# Altium PCB PCB1_IGNIS_v2.PcbDoc
Units mil, origin at the board's own origin, x right, y up, seen from the top; angles counter-clockwise.
Board outline 3740.16 x 1574.8 mil, 4 copper layers (Top Layer, GND, PWR, Bottom Layer), stack 23.756 mil thick; 91 components, 58 nets, 359 pads, 9 vias.
Unrouted connection lines stored in the file: 222.
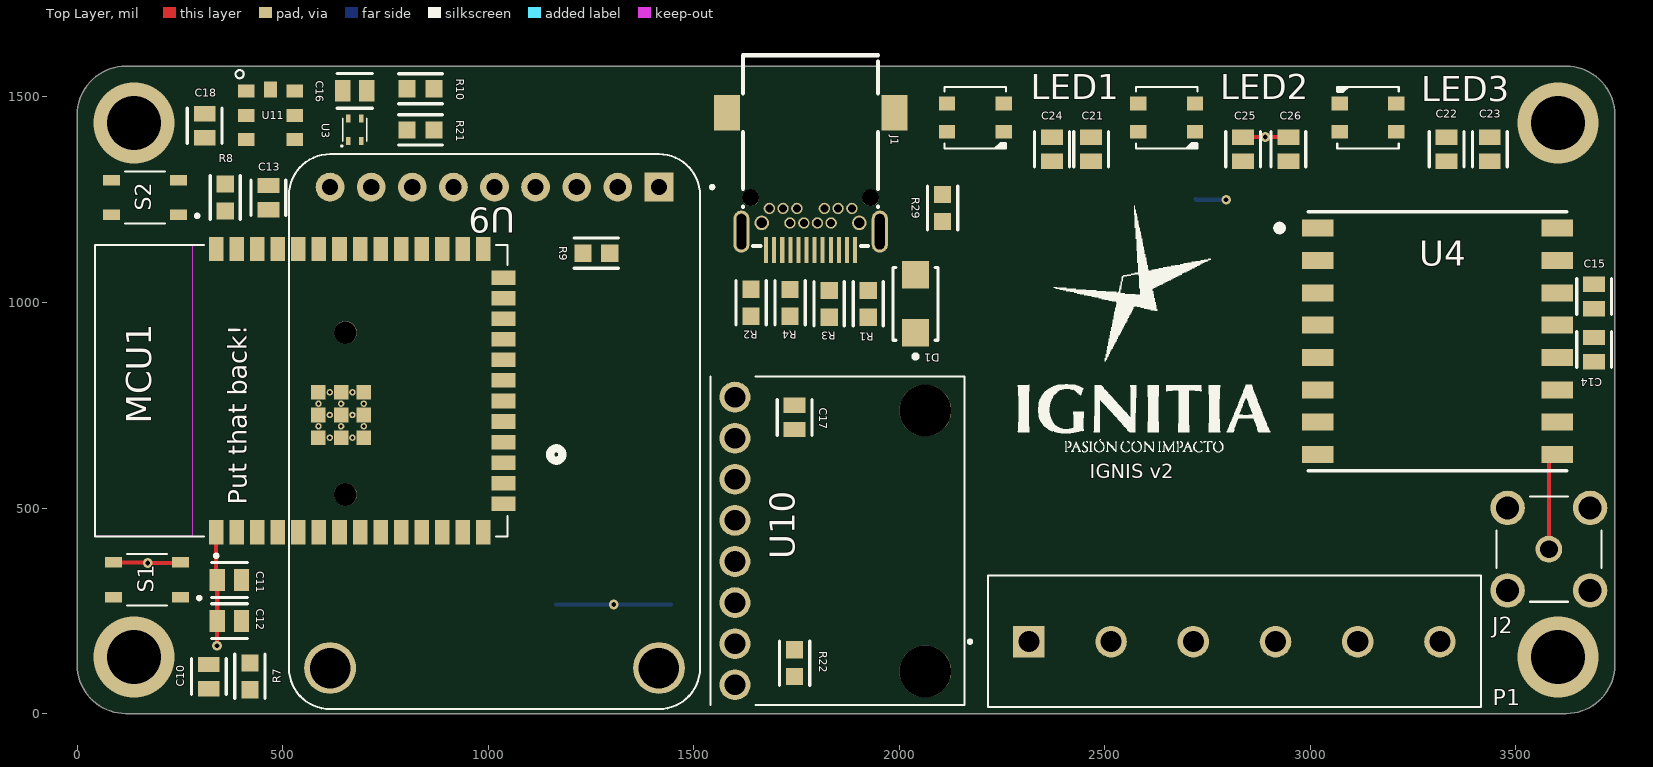
[diagram p0: Top Layer view]
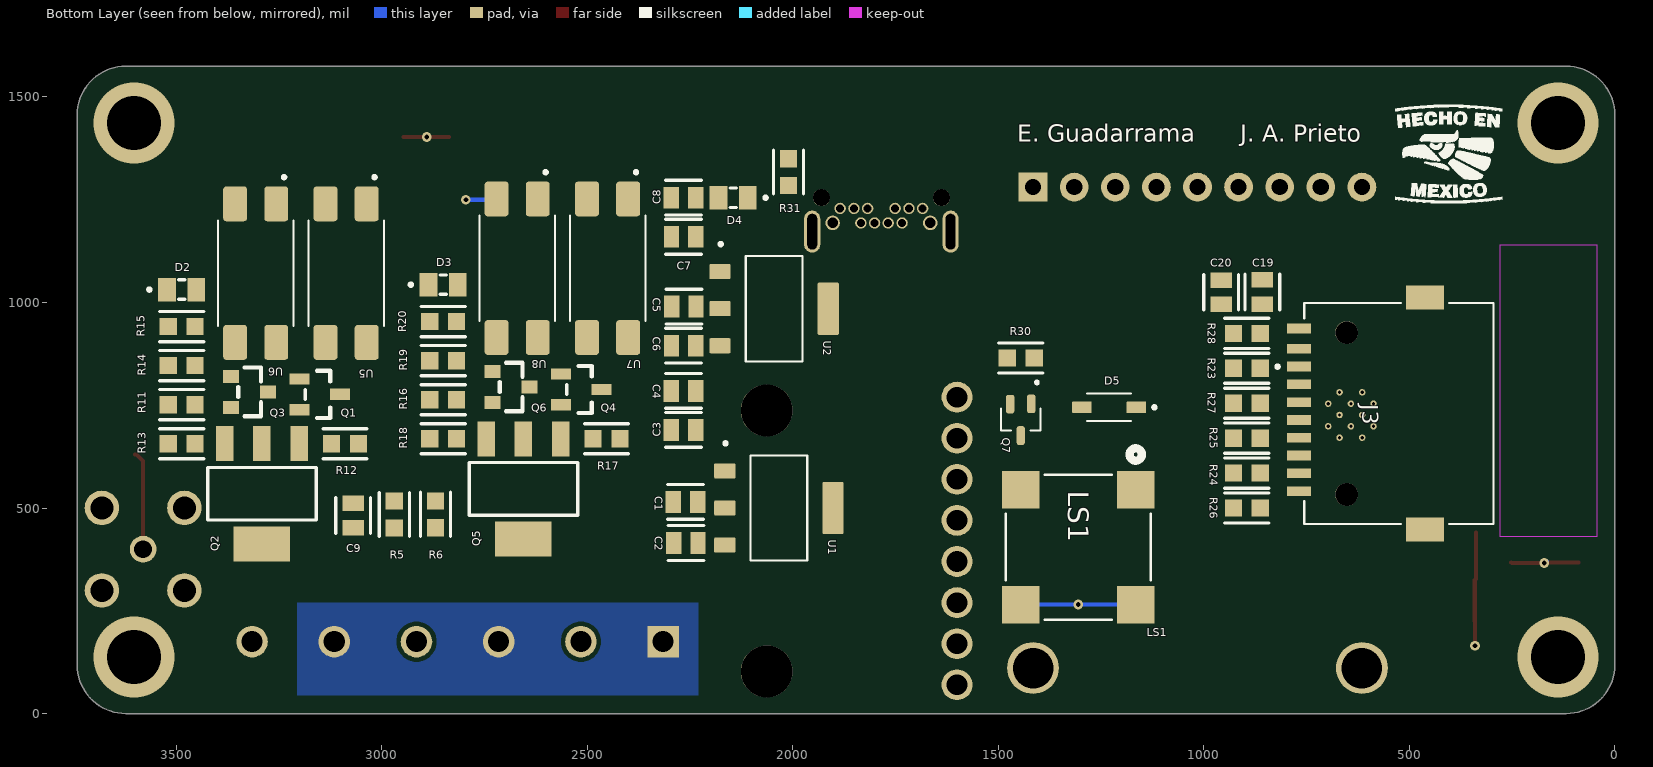
[diagram p1: Bottom Layer view, seen from below]
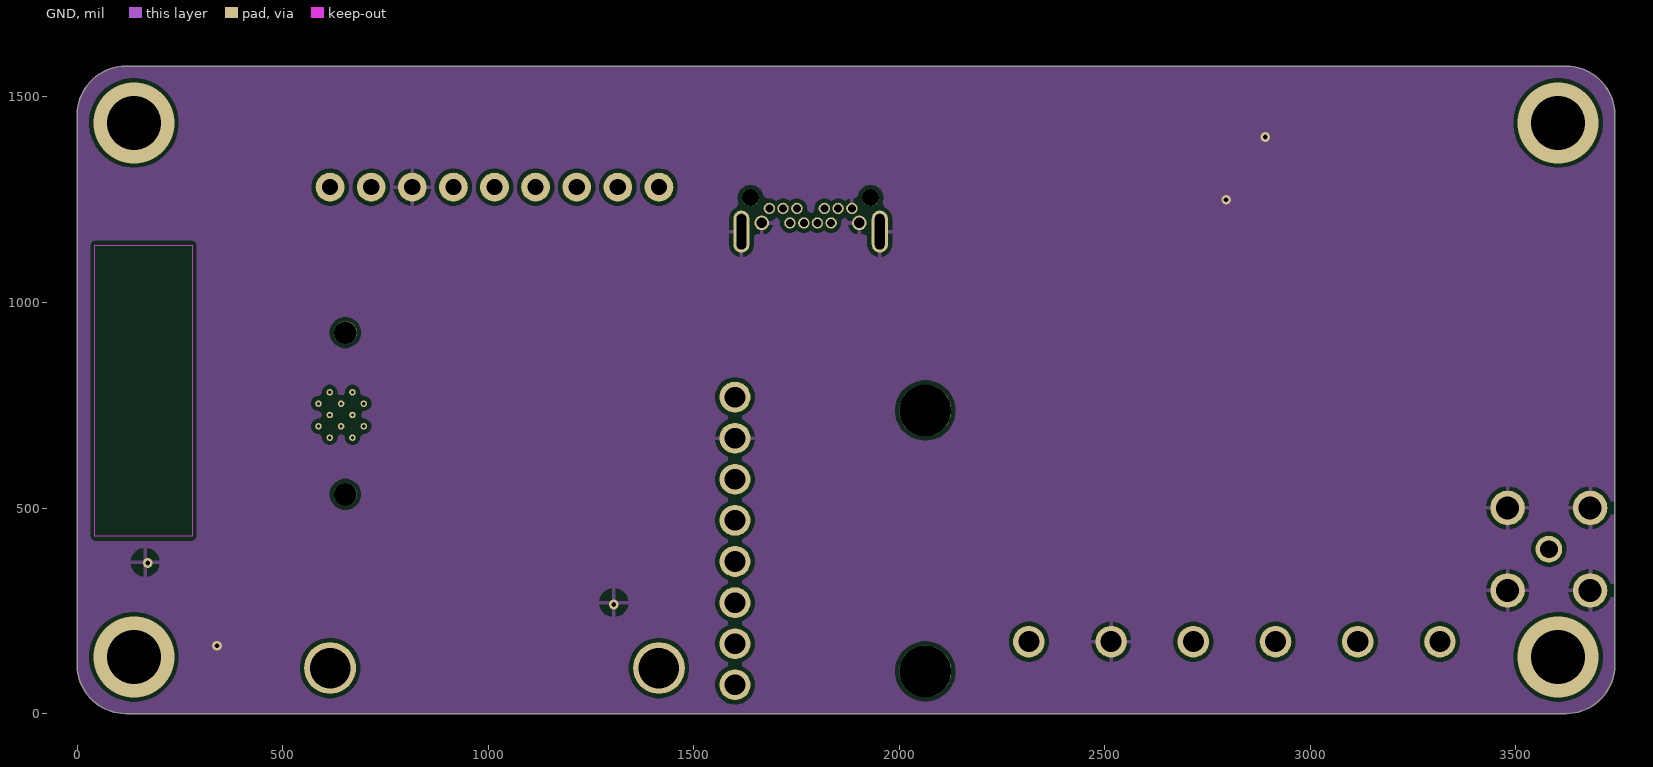
[diagram p2: GND]
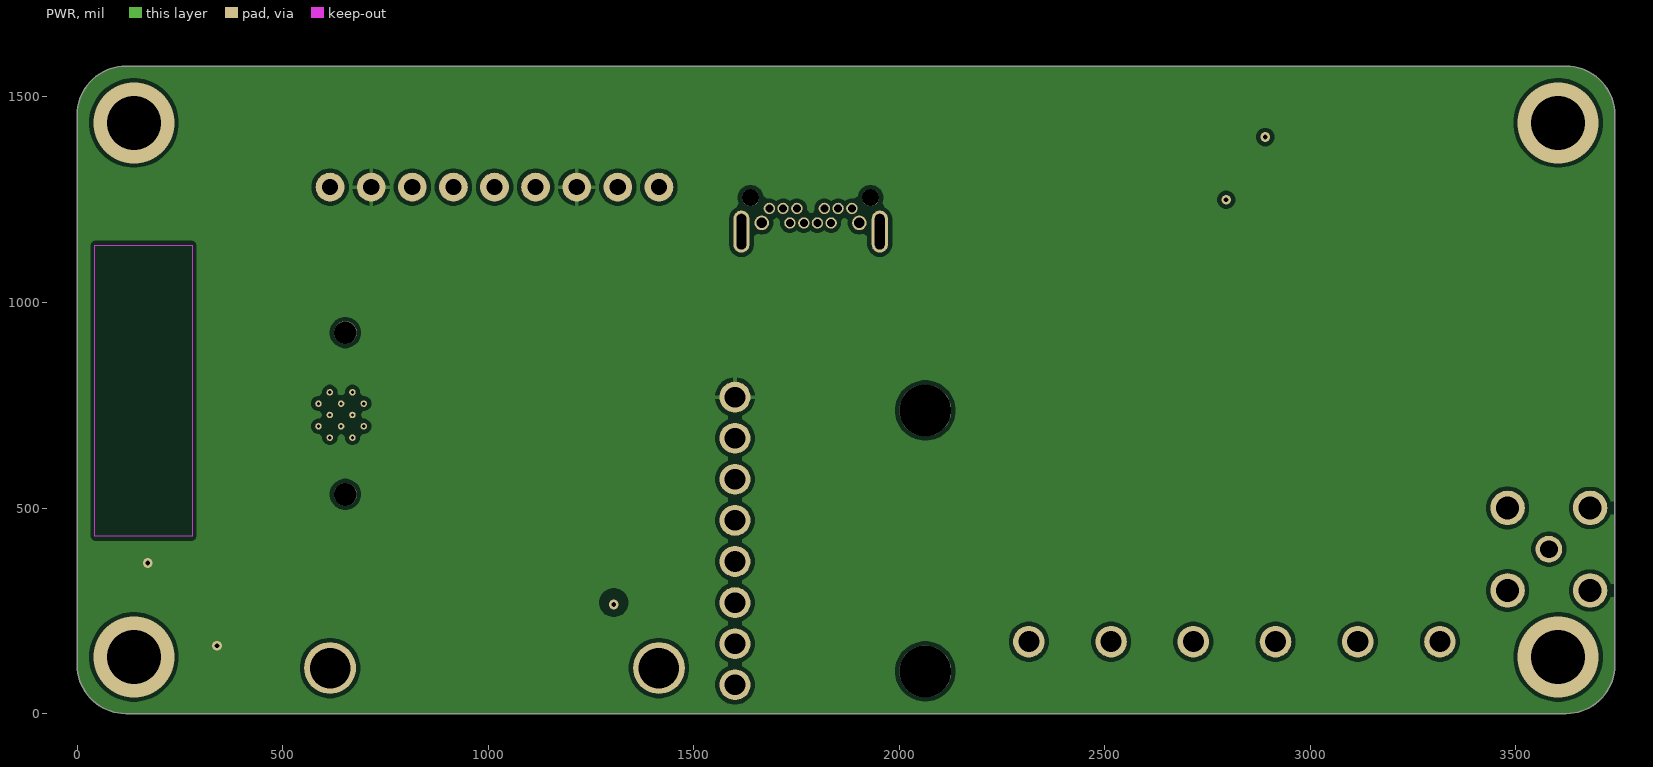
[diagram p3: PWR]

## Layer stack, top to bottom
Top Solder: solder mask 0.4, Solder Resist, Dk 3.5
Top Layer: signal copper 1.378
Dielectric 2: prepreg 2.8, PP-006, Dk 4.1
GND: signal copper 1.4
Dielectric 1: dielectric 12.6, FR-4, Dk 4.8
PWR: signal copper 1.4
Dielectric 3: prepreg 2.8, PP-006, Dk 4.1
Bottom Layer: signal copper 1.378
Bottom Solder: solder mask 0.4, Solder Resist, Dk 3.5

## Board outline
0,118 0,1456.8 cw(c118,1456.8) 118,1574.8 3622.16,1574.8 cw(c3622.16,1456.8) 3740.16,1456.8 3740.16,118 cw(c3622.16,118) 3622.16,0 118,0 cw(c118,118)

## Design rules (kind name [scope] priority, off if disabled: settings)
Clearance USBC_3 [InComponent('J1') vs InComponent('J1')] p1: gap=3.94 ignorepadtopadclearanceinfootprint=FALSE
Clearance MCU_2 [InComponent('MCU1') vs InComponent('MCU1')] p2: gap=1.97 ignorepadtopadclearanceinfootprint=FALSE
Clearance [All] p3: gap=10 ignorepadtopadclearanceinfootprint=FALSE
ComponentClearance GPS [InComponent('U9') vs InComponent('MCU1') Or InComponent('R9')] p1: gap=0 collisioncheckmode=3 verticalgap=100000 showdistances=FALSE donotcheckwithout3dbody=TRUE
ComponentClearance IMU [InComponent('U10') vs InComponent('U9')] p2: gap=0 collisioncheckmode=3 verticalgap=100000 showdistances=FALSE donotcheckwithout3dbody=TRUE
ComponentClearance Buzzer [InComponent('LS1') vs InComponent('R30') Or InComponent('R31') Or InComponent('Q7')  Or InComponent('P1')] p3: gap=0 collisioncheckmode=3 verticalgap=100000 showdistances=FALSE donotcheckwithout3dbody=TRUE
ComponentClearance SD [InComponent('J3') Or InComponent('C19') Or InComponent('C20') Or InComponent('R23') Or InComponent('R24') Or InComponent('R25') Or InComponent('R26') Or InComponent('R27') Or InComponent('R28') vs InComponent('U9') Or InComponent('MCU1')] p4: gap=0 collisioncheckmode=3 verticalgap=100000 showdistances=FALSE donotcheckwithout3dbody=TRUE
ComponentClearance [All] p5: gap=10 collisioncheckmode=3 verticalgap=10 showdistances=FALSE
DiffPairsRouting [All] p1: maxlimit=10 minlimit=10 mostfreqgap=10 toplayer_minwidth=15 toplayer_maxwidth=15 toplayer_prefwidth=15 midlayer1_minwidth=15 midlayer1_maxwidth=15 midlayer1_prefwidth=15 midlayer2_minwidth=15 midlayer2_maxwidth=15 midlayer2_prefwidth=15 bottomlayer_minwidth=15 bottomlayer_maxwidth=15 bottomlayer_prefwidth=15 maxuncoupledlength=500
HoleSize IMU_Hole [All] p1: absolutevalues=TRUE maxlimit=157.48 minlimit=1 maxpercent=80.000 minpercent=20.000
HoleSize "Mounting Holes" [IsVia] p2: absolutevalues=TRUE maxlimit=137.8 minlimit=1 maxpercent=80.000 minpercent=20.000
HoleSize [All] p3: absolutevalues=TRUE maxlimit=100 minlimit=1 maxpercent=80.000 minpercent=20.000
MinimumSolderMaskSliver USBC_1 [InComponent('J1') vs InComponent('J1')] p1: minsoldermaskwidth=1.18
MinimumSolderMaskSliver [All] p2: minsoldermaskwidth=10
PolygonConnect PolygonConnect_1 [All vs IsNamedPolygon('VBAT_L04_P000')] p1: connectstyle=Direct reliefconductorwidth=10 reliefentries=4 polygonreliefangle="90 Angle" airgapwidth=10
PolygonConnect [All] p2: connectstyle=Relief reliefconductorwidth=10 reliefentries=4 polygonreliefangle="90 Angle" airgapwidth=10
RoutingVias [All] p1: holewidth=12 width=24 viastyle="Through Hole" minholewidth=10 minwidth=20 maxholewidth=28 maxwidth=50
SilkToSolderMaskClearance MCU_GPS [InComponent('MCU1') vs InComponent('U9')] p1: minsilkscreentomaskgap=1.97 clearancetoexposedcopper=TRUE
SilkToSolderMaskClearance Diodes [InComponent('D1') Or InComponent('D2') Or InComponent('D3') Or InComponent('D4') Or InComponent('D5')] p2: minsilkscreentomaskgap=1.97 clearancetoexposedcopper=TRUE
SilkToSolderMaskClearance USBC_2 [InComponent('J1') vs InComponent('J1')] p3: minsilkscreentomaskgap=1.18 clearancetoexposedcopper=TRUE
SilkToSolderMaskClearance [IsPad] p4: minsilkscreentomaskgap=3.94 clearancetoexposedcopper=TRUE
SolderMaskExpansion [All] p1: expansion=0 istentingtop=FALSE
SupplyNets "Schematic Supply Nets_3" [InNet('VCC_3V3')] p1: voltage=0.000
SupplyNets "Schematic Supply Nets_2" [InNet('GND')] p2: voltage=0.000
SupplyNets "Schematic Supply Nets_1" [InNet('VBAT')] p3: voltage=0.000
SupplyNets "Schematic Supply Nets" [InNet('VCC_5V')] p4: voltage=0.000
Width [All] p1: maxlimit=10 minlimit=10 preferedwidth=10
25 further rules are at their usual default settings.

## Classes and differential pairs
component class U_Storage: C19 C20 J3 R23 R24 R25 R26 R27 R28
component class U_Sensors: C16 C17 C18 R10 R21 R22 U3 U10 U11
component class U_RF_LoRa_&_GPS: C14 C15 J2 R9 U4 U9
component class U_Pyros: D2 D3 P1 Q1 Q2 Q3 Q4 Q5 Q6 R11 R12 R13 R14 R15 R16 R17 R18 R19 R20 U5 U6 U7 U8
component class U_Power: C1 C2 C3 C4 C5 C6 C7 C8 C9 D1 D4 J1 R1 R2 R3 R4 R5 R6 R31 U1 U2
component class U_Indicators: C21 C22 C23 C24 C25 C26 D5 LED1 LED2 LED3 LS1 Q7 R29 R30
component class Main: C10 C11 C12 C13 MCU1 R7 R8 S1 S2
differential pair USB2: +USB2_P -USB2_N

## Components (designator, comment, footprint, x,y, rotation, side; value= is the part's Value field where it differs from the comment)
C1 "10uF" FP-C0805C-DN-MFG 2260.47,515 r0 bottom value="0.10 μF"
C2 "100nF" FP-C0805C-DN-MFG 2259.53,415 r0 bottom value="0.10 μF"
C3 "10uF" FP-C0805C-DN-MFG 2265.47,690 r0 bottom value="0.10 μF"
C4 "100nF" FP-C0805C-DN-MFG 2265.47,785 r0 bottom value="0.10 μF"
C5 "10uF" FP-C0805C-DN-MFG 2264.53,990 r0 bottom value="0.10 μF"
C6 "100nF" FP-C0805C-DN-MFG 2265,895 r0 bottom value="0.10 μF"
C7 "10uF" FP-C0805C-DN-MFG 2265,1160 r0 bottom value="0.10 μF"
C8 "100nF" FP-C0805C-DN-MFG 2265.47,1255 r0 bottom value="0.10 μF"
C9 "100nF" FP-C0805C-DN-MFG 3068.85,482 r270 bottom value="0.10 μF"
C10 "1uF" FP-C0805C-DN-MFG 320,90 r270 top value="0.10 μF"
C11 "100nF" FP-C0805C-DN-MFG 370,325 r180 top value="0.10 μF"
C12 "22uF" FP-C0805C-DN-MFG 370,225 r180 top value="0.10 μF"
C13 "100nF" FP-C0805C-DN-MFG 465,1255 r90 top value="0.10 μF"
C14 "100nF" FP-C0805C-DN-MFG 3690,885.47 r270 top value="0.10 μF"
C15 "10uF" FP-C0805C-DN-MFG 3690,1014.53 r90 top value="0.10 μF"
C16 "100nF" FP-C0805C-DN-MFG 675,1515 r0 top value="0.10 μF"
C17 "100nF" FP-C0805C-DN-MFG 1745,720.47 r270 top value="0.10 μF"
C18 "100nF" FP-C0805C-DN-MFG 310,1430 r270 top value="0.10 μF"
C19 "22uF" FP-C0805C-DN-MFG 857.35,1025.47 r270 bottom value="0.10 μF"
C20 "100nF" FP-C0805C-DN-MFG 957.35,1025 r270 bottom value="0.10 μF"
C21 "100nF" FP-C0805C-DN-MFG 2466.24,1372.97 r90 top value="0.10 μF"
C22 "100nF" FP-C0805C-DN-MFG 3331.24,1372.97 r90 top value="0.10 μF"
C23 "100nF" FP-C0805C-DN-MFG 3436.24,1372.97 r90 top value="0.10 μF"
C24 "10uF" FP-C0805C-DN-MFG 2371.24,1372.97 r90 top value="0.10 μF"
C25 "10uF" FP-C0805C-DN-MFG 2836.24,1372.97 r90 top value="0.10 μF"
C26 "10uF" FP-C0805C-DN-MFG 2946.24,1372.97 r90 top value="0.10 μF"
D1 "SS24SHE3_B/H" FP-95400-MFG 2039.18,996.73 r90 top
D2 "SML-LXT0805IW-TR" LEDC2012X120N 3486.15,1031.5 r180 bottom
D3 "SML-LXT0805IW-TR" LEDC2012X120N 2850,1043.5 r180 bottom
D4 "SML-LXT0805IW-TR" LEDC2012X120N 2144.57,1255 r0 bottom
D5 "1N4148W-7" SOD3715X135N 1230,745 r0 bottom
J1 "2345986-1" TE_2345986-1 1779.18,1411.73 r180 top
J2 "BWSMA-KE-Z001" BAT_WIRELESS_BWSMA-KE-Z001 3580,400 r90 top
J3 "MSD-11-A" CUI_MSD-11-A 525,730 r90 bottom
LED1 "WS2812B" *LED3535 2185,1450 r180 top
LED2 "WS2812B" *LED3535 2650,1450 r180 top
LED3 "WS2812B" *LED3535 3140,1450 r0 top
LS1 "MLT-8530" MLT-8530_JHE 1305,405 r270 bottom
MCU1 "ESP32-S3-WROOM-1-N16R8" XCVR_ESP32-S3-WROOM-1-N16R2 545,785.47 r90 top
P1 "1729160" PHOENIX_1729160 2215,15.55 r0 top
Q1 "S8050_NPN" PCBComponent_1#1 3156.54,773.98 r0 bottom
Q2 "NCE6005AR_Mosfet_N" PCBComponent_1#2 3295,530 r90 bottom
Q3 "SS8550_PNP" PCBComponent_1#3 3311.15,781.5 r0 bottom
Q4 "S8050_NPN" PCBComponent_1#1 2520.39,785.98 r0 bottom
Q5 "NCE6005AR_Mosfet_N" PCBComponent_1#2 2658.85,542 r90 bottom
Q6 "SS8550_PNP" PCBComponent_1#3 2675,793.5 r0 bottom
Q7 "NTS4001NT1G" SOT65P220X100-3N 1445,715 r270 bottom
R1 "5.1k" FP-MCT0603-IPC_A 1924.18,996.73 r270 top
R2 "5.1k" FP-MCT0603-IPC_A 1639.18,999.39 r270 top
R3 "22" FP-MCT0603-IPC_A 1829.18,996.73 r90 top
R4 "22" FP-MCT0603-IPC_A 1734.18,999.08 r90 top
R5 "47k" FP-MCT0603-IPC_A 2968.85,484.35 r270 bottom
R6 "100k" FP-MCT0603-IPC_A 2868.85,484.66 r270 bottom
R7 "10k" FP-MCT0603-IPC_A 420,90.47 r90 top
R8 "10k" FP-MCT0603-IPC_A 360,1255.47 r270 top
R9 "4k7" FP-MCT0603-IPC_A 1262.65,1120 r0 top
R10 "4k7" FP-MCT0603-IPC_A 835,1520 r180 top
R11 "1k" FP-MCT0603-IPC_A 3486.15,751.5 r180 bottom
R12 "100" FP-MCT0603-IPC_A 3088.8,656.5 r0 bottom
R13 "1k" FP-MCT0603-IPC_A 3486.15,656.5 r0 bottom
R14 "1k" FP-MCT0603-IPC_A 3486.15,846.5 r0 bottom
R15 "600" FP-MCT0603-IPC_A 3486.15,941.5 r180 bottom
R16 "1k" FP-MCT0603-IPC_A 2850,763.5 r180 bottom
R17 "100" FP-MCT0603-IPC_A 2452.65,668.5 r0 bottom
R18 "1k" FP-MCT0603-IPC_A 2850,668.5 r0 bottom
R19 "1k" FP-MCT0603-IPC_A 2850,858.5 r0 bottom
R20 "600" FP-MCT0603-IPC_A 2850,953.5 r180 bottom
R21 "4k7" FP-MCT0603-IPC_A 835,1420 r180 top
R22 "4k7" FP-MCT0603-IPC_A 1745,122.65 r90 top
R23 "10k" FP-MCT0603-IPC_A 895,840 r180 bottom
R24 "10k" FP-MCT0603-IPC_A 895,585 r180 bottom
R25 "10k" FP-MCT0603-IPC_A 895,670 r180 bottom
R26 "10k" FP-MCT0603-IPC_A 895,500 r180 bottom
R27 "10k" FP-MCT0603-IPC_A 895,755 r180 bottom
R28 "10k" FP-MCT0603-IPC_A 895,925 r180 bottom
R29 "33" FP-MCT0603-IPC_A 2105,1230 r90 top
R30 "10k" FP-MCT0603-IPC_A 1445,865 r0 bottom
R31 "1k" FP-MCT0603-IPC_A 2010,1317.35 r90 bottom
S1 "Reset" SW_SKRPABE010 170,325.47 r180 top
S2 "Boot" SW_SKRPABE010 165,1255.47 r180 top
U1 "AMS1117-5V" SOT229P700X180-4N 2033.31,500.16 r270 bottom
U2 "AMS1117-3V3" SOT229P700X180-4N 2045,985 r270 bottom
U3 "SHT40-AD1B-R3" SHT4X 675,1420 r90 top
U4 "RFM95W-868S2" XCVR_RFM95W-868S2 3308.66,905.63 r0 top
U5 "PC817X2NIP1B" SOIC254P960X420-4N 3086.15,1071.5 r270 bottom
U6 "PC817X2NIP1B" SOIC254P960X420-4N 3306.15,1071.5 r270 bottom
U7 "PC817X2NIP1B" SOIC254P960X420-4N 2450,1083.5 r270 bottom
U8 "PC817X2NIP1B" SOIC254P960X420-4N 2670,1083.5 r270 bottom
U9 "746" XCVR_746 1015,685.83 r180 top
U10 "GY-521" MODULE_GY-521 1849.21,420 r0 top
U11 "BMP180" LGA7-1.5-3.8X3.6MM 470,1455.47 r90 top

## Footprints (in the part's own frame and the unit in brackets; to place one, negate y for a bottom-side part, rotate by r counter-clockwise, add the part's x,y. Pads: shape width x height; smd on the part's side, far side on the other; paste and mask are expansions set on the pad)
*LED3535 [mm]
  rect 1x0.85 smd: 1(-1.75,0.875) 2(-1.75,-0.875) 3(1.75,-0.875) 4(1.75,0.875)
  silkscreen extent -1.91,-1.9 1.9,1.91, body extent -2.7,-2.5 2.7,2.5, height 1.49
BAT_WIRELESS_BWSMA-KE-Z001 [mm]
  round 1.65 hole 1.1: 1(0,0)
  round 2.13 hole 1.42: 2_1(-2.55,2.55) 2_2(2.55,2.55) 2_3(2.55,-2.55) 2_4(-2.55,-2.55)
  silkscreen extent -3.25,-3.25 3.25,3.25, body extent -3.23,-11.73 3.23,3.23, height 9.75
CUI_MSD-11-A [mm]
  rect 0.6x1.5 smd: CD(5.25,6.18) P1(2.9,6.18) P2(1.8,6.18) P3(0.7,6.18) P4(-0.4,6.18) P5(-1.5,6.18) P6(-2.6,6.18) P7(-3.7,6.18) P8(-4.8,6.18) WP(4,6.18)
  rect 1.5x2.34 smd: G1(-7.17,-1.62) G2(7.17,-1.62)
  round 1.4 hole 1.4 unplated: ""(-5,3.23) ""(5,3.23)
  silkscreen extent -6.84,-5.85 6.84,7.6, body extent -7.39,-5.87 7.39,6.73, height 1.82
FP-95400-MFG [mm]
  rect 1.7x1.68 smd paste+0 mask+0: 1(-1.79,0) 2(1.79,0)
  silkscreen extent -3.37,-1.4 2.25,1.4, body extent -2.74,-1.5 2.74,1.5, height 0.25
FP-C0805C-DN-MFG [mm]
  rect 0.95x1.35 smd paste+0 mask+0: 1(-0.75,0) 2(0.75,0)
  silkscreen extent -1.1,-1.07 1.1,1.07, body extent -1,-0.63 1,0.63, height 0.88
FP-MCT0603-IPC_A [mil]
  rect 41.88x41.82 smd paste+0 mask+0: 1(-32.65,0) 2(32.65,0)
  silkscreen extent -54,-37 54,37, body extent -73,-41 73,41, height 10
LEDC2012X120N [mm]
  rect 1.1x1.45 smd: A(0.9,0) C(-0.9,0)
  silkscreen extent -2.1,-0.6 0.2,0.6, body extent -1,-0.65 1,0.65, height 0.9
LGA7-1.5-3.8X3.6MM [mm]
  rect 0.8x1 smd: 1(1.5,1.5) 2(0,1.5) 3(-1.5,1.5) 4(-1.5,-1.5) 5(0,-1.5) 6(1.5,-1.5)
  rect 1x0.8 smd: 7(1.6,0)
  silkscreen extent 2.29,1.65 2.79,2.16, body extent -1.9,-1.8 1.9,1.8, height 1
MLT-8530_JHE [mil]
  rect 91x91 smd paste+0 mask+0: 1(-139.76,139.76) 2(-139.76,-139.76) 3(139.76,139.76) 4(139.76,-139.76)
  silkscreen extent -240,-177 177,177
MODULE_GY-521 [mm]
  round 1.905 hole 1.27 mask+0.102: AD0(-6.33,-6.35) GND(-6.33,6.35) INT(-6.33,-8.89) SCL(-6.33,3.81) SDA(-6.33,1.27) VCC(-6.33,8.89) XCL(-6.33,-3.81) XDA(-6.33,-1.27)
  round 3.2 hole 3.2 unplated mask+0: ""(5.43,-8.06) ""(5.43,8.06)
  silkscreen extent -7.85,-10.15 7.85,10.15, body extent -7.85,-10.15 7.85,10.15, height 11.6
PCBComponent_1#1 [mm]
  rect 1.25x0.7 smd paste+0 mask+0.102: 1(1.092,-1.014) 2(1.092,0.886) 3(-1.407,-0.064)
  silkscreen extent -0.81,-1.52 0.74,1.4
PCBComponent_1#2 [mm]
  rect 2.159x1.092 smd paste+0 mask+0.102: 1(3.213,-2.409) 2(3.213,-0.098) 3(3.213,2.188)
  rect 2.159x3.505 smd paste+0 mask+0.102: 4(-2.984,-0.098)
  silkscreen extent -1.51,-3.46 1.74,3.24
PCBComponent_1#3 [mm]
  rect 1x0.8 smd paste+0 mask+0.051: 1(1.403,-0.974) 2(1.403,0.926) 3(-0.897,-0.024)
  silkscreen extent -0.45,-1.52 0.95,1.48
PHOENIX_1729160 [mm]
  rect 1.95x1.95 / inner round 1.95 / far side rect 1.95x1.95 hole 1.3: 1(2.54,4.05)
  round 1.95 hole 1.3: 2(7.62,4.05) 3(12.7,4.05) 4(17.78,4.05) 5(22.86,4.05) 6(27.94,4.05)
  silkscreen extent -1.2,0 30.48,8.15, body extent -0.54,-0.02 30.51,8.13, height 9.97
SHT4X [mm]
  rect 0.5x0.3 smd: 1(-0.7,0.4) 2(-0.7,-0.4) 3(0.7,-0.4) 4(0.7,0.4)
  silkscreen extent -1.05,-0.75 0.7,0.85, body extent -0.75,-0.75 0.75,0.75, height 0.54
SOD3715X135N [mm]
  rrect18% 1.21x0.73 smd paste+0 mask+0.102: A(1.68,0) C(-1.68,0)
  silkscreen extent -2.9,-0.85 1.35,0.85, body extent -1.91,-0.8 1.9,0.8, height 1.1
SOIC254P960X420-4N [mm]
  rrect25% 2.15x1.48 smd: 1(-4.28,1.27) 2(-4.28,-1.27) 3(4.28,-1.27) 4(4.28,1.27)
  silkscreen extent -6.03,-2.33 3.25,2.33, body extent -4.87,-2.29 4.87,2.29, height 4
SOT65P220X100-3N [mm]
  rrect50% 1.15x0.5 smd: 1(-0.98,0.65) 2(-0.96,-0.65) 3(0.98,0)
  silkscreen extent -2.4,-1.21 0.68,1.21
SOT229P700X180-4N [mm]
  rrect15% 0.93x1.31 smd: 1(-2.29,-3.345) 2(0,-3.345) 3(2.29,-3.345)
  rrect15% 3.24x1.31 smd: 4(0,3.345)
  silkscreen extent -4.09,-3.4 3.25,1.75, body extent -3.25,-3.5 3.25,3.5, height 1.8
SW_SKRPABE010 [mm]
  rect 1.05x0.65 smd: 1(-2.075,1.075) 2(2.075,1.075) 3(-2.075,-1.075) 4(2.075,-1.075)
  silkscreen extent -3.32,-1.6 1.23,1.6, body extent -2.3,-1.6 2.3,1.6, height 2.5
TE_2345986-1 [mm]
  rect 0.25x1.6 smd paste-100 mask+0.051: A1(-2.87,7.201) A2(-2.37,7.201) A3(-1.87,7.201) A4(-1.37,7.201) A5(-0.87,7.201) A6(-0.37,7.201) A7(0.13,7.201) A8(0.63,7.201) A9(1.129,7.201) A10(1.629,7.201) A11(2.129,7.201) A12(2.629,7.201)
  round 0.9 hole 0.65 paste-2539.97 mask+0.051: B1(2.899,5.541) B12(-3.131,5.541)
  round 0.7 hole 0.5 paste-2539.97 mask+0.051: B2(2.429,4.641) B3(1.579,4.641) B4(1.159,5.541) B5(0.729,4.641) B6(0.299,5.541) B7(-0.541,5.541) B8(-0.971,4.641) B9(-1.391,5.541) B10(-1.821,4.641) B11(-2.671,4.641)
  oval 1x2.6 hole 0.6 slot 2.2 at 90 deg paste-2539.97 mask+0.051: SH1(4.154,6.081) SH2(-4.396,6.081)
  rect 1.6x2.2 smd paste-100 mask+0.051: SH3(5.054,-1.269) SH4(-5.296,-1.269)
  round 1.05 hole 1.05 unplated paste-2539.97: ""(-3.831,3.981) ""(3.589,3.981)
  silkscreen extent -4.29,-4.82 4.05,6.97, body extent -4.75,-5.04 4.49,7.75, height 3.34
XCVR_746 [mil]
  rect 70x70 / inner round 70 / far side rect 70x70 hole 39.37 mask+4.02: 1(-400,-595)
  round 70 hole 39.37 mask+4.02: 2(-300,-595) 3(-200,-595) 4(-100,-595) 5(0,-595) 6(100,-595) 7(200,-595) 8(300,-595) 9(400,-595)
  round 125.98 hole 98.43 mask+4.02: SH1(-400,575) SH2(400,575)
  silkscreen extent -533,-675 500,675, body extent -500,-670 500,670, height 591
XCVR_ESP32-S3-WROOM-1-N16R2 [mm]
  rect 1.5x0.9 smd: 2(-8.75,3.99) 3(-8.75,2.72) 4(-8.75,1.45) 5(-8.75,0.18) 6(-8.75,-1.09) 7(-8.75,-2.36) 8(-8.75,-3.63) 9(-8.75,-4.9) 10(-8.75,-6.17) 11(-8.75,-7.44) 12(-8.75,-8.71) 13(-8.75,-9.98) 14(-8.75,-11.25) 27(8.75,-11.25) 28(8.75,-9.98) 29(8.75,-8.71) 30(8.75,-7.44) 31(8.75,-6.17) 32(8.75,-4.9) 33(8.75,-3.63) 34(8.75,-2.36) 35(8.75,-1.09) 36(8.75,0.18) 37(8.75,1.45) 38(8.75,2.72) 39(8.75,3.99) GND(-8.75,5.26) GND(8.75,5.26)
  rect 0.9x1.5 smd: 15(-6.985,-12.5) 16(-5.715,-12.5) 17(-4.445,-12.5) 18(-3.175,-12.5) 19(-1.905,-12.5) 20(-0.635,-12.5) 21(0.635,-12.5) 22(1.905,-12.5) 23(3.175,-12.5) 24(4.445,-12.5) 25(5.715,-12.5) 26(6.985,-12.5)
  round 0.4 hole 0.2 mask+0: 41_10(-1.5,-1.76) 41_11(-2.9,-1.76) 41_12(-0.1,-1.76) 41_13(-2.9,-3.16) 41_14(-1.5,-3.16) 41_15(-0.1,-3.16) 41_16(-2.2,-1.06) 41_17(-0.8,-1.06) 41_18(-2.2,-2.46) 41_19(-0.8,-2.46) 41_20(-2.2,-3.86) 41_21(-0.8,-3.86)
  rect 0.9x0.9 smd: GND(-2.9,-2.46) GND(-2.9,-1.06) GND(-2.9,-3.86) GND(-1.5,-1.06) GND(-1.5,-3.86) GND(-1.5,-2.46) GND(-0.1,-1.06) GND(-0.1,-2.46) GND(-0.1,-3.86)
  Keep-Out Layer region: 9,6.75 -9,6.75 -9,12.75 9,12.75
  Keep-Out Layer region: 9,6.75 -9,6.75 -9,12.75 9,12.75
  silkscreen extent -10.3,-12.75 9,12.75, body extent -9,-12.75 9,12.75, height 3.25
XCVR_RFM95W-868S2 [mm]
  rect 1.95x1.05 smd: 1(-7.4,7) 2(-7.4,5) 3(-7.4,3) 4(-7.4,1) 5(-7.4,-1) 6(-7.4,-3) 7(-7.4,-5) 8(-7.4,-7) 9(7.4,-7) 10(7.4,-5) 11(7.4,-3) 12(7.4,-1) 13(7.4,1) 14(7.4,3) 15(7.4,5) 16(7.4,7)
  silkscreen extent -10.04,-8 8,8, body extent -8,-8 8,8, height 1.8

## Part data
C1 C2 C3 C4 C5 C6 C7 C8 C9 C10 C11 C12 C13 C14 C15 C16 C17 C18 C19 C20 C21 C22 C23 C24 C25 C26: library part CMP-2007-00279-2, "CAP CER 0.1UF 50V X7R 0805", Capacitance="0.10 μF", Manufacturer=KEMET, Manufacturer Part Number=C0805C104K5RACTU, Package=C0805C-DN, Temperature="-55°C to +125°C", Temperature Characteristic=X7R, Temperature Coefficient=30ppm/°C, Temperature Range High=+125°C, Temperature Range Low=-55°C, Tolerance=0.1, Voltage Rating="50 V", Automotive=No, Category=Cap, ComponentLink2Description=Datasheet, ComponentLink2URL=https://content.kemet.com/datasheets/KEM_C1003_C0G_SMD.pdf, Device Class L1="Passive Components", Device Class L2=Capacitors, Device Class L3="Ceramic Capacitors", Digikey Description="CAP CER 0.1UF 50V X7R 0805", Height=0.88mm, Ipc Land Pattern Name=CAPC200125X78, Lead Free=Yes, Material=Ceramic, Mouser Description="Cap Ceramic 0.1uF 50V X7R 10% SMD 2.0 x 1.2 mm 125 C Paper T/R", Octopart=https://octopart.com/c0805c104k5ractu-kemet-143926, RoHS=TRUE
D1: library part CMP-02539-000047-1, "DIODE SCHOTTKY 2A 40V DO-214AC", RoHS Compliant=Yes
D2 D3 D4: "LED;Red;11mcd;0.061In.Dia.;SMD;100mA;2V Vf;635nm;140deg;SMD;White Diffused;5V Vr", Package="0805 Lumex", Check_prices=https://www.snapeda.com/parts/SML-LXT0805IW-TR/Lumex+Opto%252FComponents+Inc./view-part/?ref=eda, MF="Lumex Opto/Components", MP=SML-LXT0805IW-TR, SnapEDA_Link=https://www.snapeda.com/parts/SML-LXT0805IW-TR/Lumex+Opto%252FComponents+Inc./view-part/?ref=snap
D5: "Diode Standard 100 V 300mA (DC) Surface Mount SOD-123", Package="SOD-123 Fairchild Semiconductor", Check_prices=https://www.snapeda.com/parts/1N4148W-7/Diodes+Inc./view-part/?ref=eda, MF="Diodes Inc.", MP=1N4148W-7, SnapEDA_Link=https://www.snapeda.com/parts/1N4148W-7/Diodes+Inc./view-part/?ref=snap
J1: Package=None, Availability=Unavailable, MP=2345986-1, Price=None
J2: "1 Inner bore SMA Board Edge Positive foot -65â„ƒ~+165â„ƒ 50Î© Plugin RF Connectors / Coaxial Connectors ROHS", Package=None, Check_prices=https://www.snapeda.com/parts/BWSMA-KE-Z001/Bat+Wireless/view-part/?ref=eda, MF="Bat Wireless", MP=BWSMA-KE-Z001, SnapEDA_Link=https://www.snapeda.com/parts/BWSMA-KE-Z001/Bat+Wireless/view-part/?ref=snap
J3: "Micro SD Card Connector, 8 Positions, Connector and Ejector, Push In, Auto Eject Out, Surface Mount, 1.85 mm Heaight Above Board, Gold Flash", Package=None, Check_prices=https://www.snapeda.com/parts/MSD-11-A/Same+Sky/view-part/?ref=eda, MF="Same Sky", MP=MSD-11-A, SnapEDA_Link=https://www.snapeda.com/parts/MSD-11-A/Same+Sky/view-part/?ref=snap
LED1 LED2 LED3: "Intelligent control LED integrated light source", Package=None, Check_prices=https://www.snapeda.com/parts/WS2812B/Worldsemi/view-part/?ref=eda, MF=Worldsemi, MP=WS2812B, SnapEDA_Link=https://www.snapeda.com/parts/WS2812B/Worldsemi/view-part/?ref=snap
LS1: "Description", Manufacturer_Name="Jiangsu Huaneng Elec", Copyright="Copyright (C) 2025 Ultra Librarian. All rights reserved.", Manufacturer_Part_Number=MLT-8530, RefDes=RefDes, Type=Type
MCU1: library part ESP32-S3-WROOM-1-N16R2, "Bluetooth, WiFi 802.11b/g/n, Bluetooth v5.0 Transceiver Module 2.4GHz PCB Trace Surface Mount", Package="NON STANDARD Espressif Systems", Check_prices=https://www.snapeda.com/parts/ESP32S3WROOM1N16R2/Espressif+Systems/view-part/?ref=eda, MF="Espressif Systems", MP=ESP32S3WROOM1N16R2, SnapEDA_Link=https://www.snapeda.com/parts/ESP32S3WROOM1N16R2/Espressif+Systems/view-part/?ref=snap
P1: "PCB Terminal Screw 5.08mm 16AWG 400V 13.5A 6 Position COMBICON MKDSN Series", Package=None, Check_prices=https://www.snapeda.com/parts/1729160/Phoenix+Contact/view-part/?ref=eda, MF="Phoenix Contact", MP=1729160, SnapEDA_Link=https://www.snapeda.com/parts/1729160/Phoenix+Contact/view-part/?ref=snap
Q1 Q3 Q4 Q6: library part Component_1
Q2 Q5: library part NCE6005AR
Q7: "N-Channel 30V 270mA _Ta_ 330mW _Ta_ Surface Mount SC-70-3 _SOT323_", Package="SC-70 ON Semiconductor", Availability=Unavailable, MF="ON Semiconductor", MP=NTS4001NT1G, Price=None, SnapEDA_Link=https://www.snapeda.com/parts/NTS4001NT1G/ON%20Semiconductor/view-part/274588/?ref=snap
R1 R2 R3 R4 R5 R6 R7 R8 R9 R10 R11 R12 R13 R14 R15 R16 R17 R18 R19 R20 R21 R22 R23 R24 R25 R26 R27 R28 R29 R30 R31: library part CMP-02407-011165-1, "RES SMD 100 OHM 1% 1/8W 0603", Case Code (Imperial)=0603, Case Code (Metric)=1608, Max Operating Temperature=155°C, Max Power Dissipation=125mW, Min Operating Temperature=-55°C, Package Quantity=1000, Resistance=20kR, Resistor Type="Thin Film", Temperature Coefficient=25ppm/°C, Tolerance=0.1%, Voltage Rating=75V, Case/Package=0603, Construction=Rectangular, Depth=0.85mm, Features="Automotive AEC-Q200", Height=0.022inch, Length=1.55mm, Military Standard=Not, Number of Terminations=2, Packaging="Tape and Reel", Power Rating=125mW, Series="MCT 0603 - Precision", Termination=SMD/SMT, Weight=6.7E-05oz, Width=0.033inch
S1 S2: library part SKRPABE010, "Switch Tactile N.O. SPST Button J-Bend 0.05A 16VDC 1.57N SMD Automotive T/R", Package=None, Check_prices=https://www.snapeda.com/parts/SKRPABE010/ALPS/view-part/?ref=eda, MF=ALPS, MP=SKRPABE010, SnapEDA_Link=https://www.snapeda.com/parts/SKRPABE010/ALPS/view-part/?ref=snap
U1 U2: library part AMS1117-5.0, "1A LOW DROPOUT VOLTAGE REGULATOR", Package="SOT-223 Seeed Technology", Availability="Not in stock", Check_prices=https://www.snapeda.com/parts/AMS1117-5.0/ams/view-part/?ref=eda, MF=ams, MP=AMS1117-5.0, Price=None, SnapEDA_Link=https://www.snapeda.com/parts/AMS1117-5.0/ams/view-part/?ref=snap
U3: "Digital Relative Humidity Temperature Sensor, Â±1.8 / max 3.5 %RH, Â±0.2 Â°C, Ultra-Low-Power, with filtermembrane", Package=Package, Availability="In Stock", Check_prices=https://www.snapeda.com/parts/SHT40-AD1B-R3/Sensirion/view-part/?ref=eda, MF=Sensirion, MP=SHT40-AD1B-R3, Price=None, Purchase-URL=https://pricing.snapeda.com/search/part/SHT40-AD1B-R3/?ref=eda, SnapEDA_Link=https://www.snapeda.com/parts/SHT40-AD1B-R3/Sensirion/view-part/?ref=snap
U4: "General ISM < 1GHz LoRaâ„¢ Transceiver Module 868MHz Antenna Not Included Surface Mount", Package="Non Standard RF Solutions", Availability="In Stock", Check_prices=https://www.snapeda.com/parts/RFM95W-868S2/RF+Solutions/view-part/?ref=eda, MF=RF, MP=RFM95W-868S2, Price=None, Purchase-URL=https://pricing.snapeda.com/search?q=RFM95W-868S2&ref=eda, SnapEDA_Link=https://www.snapeda.com/parts/RFM95W-868S2/RF+Solutions/view-part/?ref=snap
U5 U6 U7 U8: "Optocoupler DC-IN 1-CH Transistor DC-OUT 4-Pin DIP SMD T/R", Package="SMD-4 Sharp Microelectronics", Check_prices=https://www.snapeda.com/parts/PC817X2NIP1B/Sharp+Microelectronics/view-part/?ref=eda, MF="Sharp Microelectronics", MP=PC817X2NIP1B, SnapEDA_Link=https://www.snapeda.com/parts/PC817X2NIP1B/Sharp+Microelectronics/view-part/?ref=snap
U9: "Ultimate GPS Breakout, 66 channel, 10 Hz updates, 5 V, -165 dBm, MTK3339 Chipset", Package="NON STANDARD-11 Adafruit", Check_prices=https://www.snapeda.com/parts/746/Adafruit+Industries/view-part/?ref=eda, MF="Adafruit Industries", MP=746, SnapEDA_Link=https://www.snapeda.com/parts/746/Adafruit+Industries/view-part/?ref=snap
U10: "Triple Axis Accelerometer Gyro Breakout", Package=Package, Check_prices=https://www.snapeda.com/parts/GY-521/GODREAM+FORDREAM+CO.%252C+LIMITED/view-part/?ref=eda, MF="GODREAM FORDREAM CO., LIMITED", MP=GY-521, SnapEDA_Link=https://www.snapeda.com/parts/GY-521/GODREAM+FORDREAM+CO.%252C+LIMITED/view-part/?ref=snap
U11: library part PRESSURE-BMP180(LGA7), "Pressure Sensor 4.35PSI ~ 15.95PSI (30kPa ~ 110kPa) Absolute - 16 ~ 19 b 7-VLGA", Package="LGA-7 Bosch", Check_prices=https://www.snapeda.com/parts/BMP180/Bosch/view-part/?ref=eda, MF=Bosch, MP=BMP180, SnapEDA_Link=https://www.snapeda.com/parts/BMP180/Bosch/view-part/?ref=snap

## Via types
v1: diameter 24, hole 12, Top Layer to Bottom Layer, 5 vias
v2: diameter 196.85, hole 131.89, Top Layer to Bottom Layer, 4 vias

## Nets (pads, with @x,y where several pads share a name; then routed paths per layer and width w, separated by ;. In a path a pad name is that pad's centre, name@x,y a point inside that pad or via, vN(x,y) a via of type N, cw(c..) or ccw(c..) an arc to the next point about the centre after c; other vN are vias at no path point)
BOOT: C13.1 MCU1.27 R8.2 S2.1 S2.2
BUZZER: MCU1.22 Q7.1 R30.1
DAT1: J3.P8 R26.2
DAT2: J3.P1 R23.2
DN: J1.A7 J1.B7 R4.2
DP: J1.A6 J1.B6 R3.2
EMATCH_CH1_B: P1.4 Q5.2 Q5.4 U7.1
EMATCH_CH2_N: P1.6 Q2.2 Q2.4 U5.1
FIX_GPS: MCU1.28 U9.4
GND: C1.2 C2.2 C3.2 C4.2 C5.2 C6.2 C7.2 C8.2 C9.2 C10.2 C11.2 C12.2 C13.2 C14.2 C15.2 C16.1 C17.2 C18.2 C19.2 C20.2 C21.2 C22.2 C23.2 C24.2 C25.2 C26.2 J1.A1 J1.A11 J1.A12 J1.B1 J1.B11 J1.B12 J1.SH1 J1.SH2 J1.SH3 J1.SH4 J2.2_1 J2.2_2 J2.2_3 J2.2_4 J3.G1 J3.G2 J3.P6 LED1.3 LED2.3 LED3.3 LS1.3 LS1.4 MCU1.GND P1.2 Q2.3 Q3.3 Q5.3 Q6.3 Q7.2 R1.2 R2.2 R5.2 R13.1 R14.2 R15.2 R18.1 R19.2 R20.2 R22.1 R30.2 R31.2 S1.3 S1.4 S2.3 S2.4 U1.1 U2.1 U3.4 U4.1 U4.8 U4.10 U6.2 U8.2 U9.7 U10.GND U11.4 U11.7 | length 919
  Top Layer w10: S1.4 89.01,367.1 170.7,367.1 v1(171.4,366.4) ; v1@168.6,366.4 170,365 v1(171.4,366.4) ; S1.3 250.3,366.4 v1(171.4,366.4) ; MCU1.GND@337.91,440.98 337.91,327.56 C11.2 C12.2 340,224.53 v1(340,165) ; C25.2 v1(2890,1402.5) C26.2
  Bottom Layer w10: v1@165,370 168.6,366.4 v1(171.4,366.4) ; LS1.3 v1(1305,265.24) LS1.4 ; U8.2 2722.01,1250 v1(2795,1250)
GPS_UART_RX: MCU1.11 U9.6
GPS_UART_TX: MCU1.10 U9.5
MPU6050_INT: MCU1.17 U10.INT
NetD2_A: D2.A U5.2
NetD2_C: D2.C R15.1
NetD3_A: D3.A U7.2
NetD3_C: D3.C R20.1
NetD4_C: D4.C R31.1
NetD5_A: D5.A LS1.2 Q7.3
NetJ1_A5: J1.A5 R1.1
NetJ1_B5: J1.B5 R2.1
NetJ2_1: J2.1 U4.9 | length 240.9
  Top Layer w10: J2.1 3580,614.37 3595.67,630.04 U4.9
NetLED1_2: LED1.2 LED2.4
NetLED1_4: LED1.4 R29.2
NetLED2_2: LED2.2 LED3.4
NetQ1_1: Q1.1 Q3.1 R11.2
NetQ1_2: Q1.2 Q3.2 R12.1
NetQ2_1: Q2.1 R12.2
NetQ4_1: Q4.1 Q6.1 R16.2
NetQ4_2: Q4.2 Q6.2 R17.1
NetQ5_1: Q5.1 R17.2
NetR9_2: R9.2 U9.2
NetR11_1: R11.1 R13.2 U6.3
NetR16_1: R16.1 R18.2 U8.3
NetR22_2: R22.2 U10.AD0
PYRO_CH1_CONT: MCU1.39 R19.1 U7.3
PYRO_CH1_GATE: MCU1.4 U8.1
PYRO_CH2_CONT: MCU1.38 R14.1 U5.3
PYRO_CH2_GATE: MCU1.5 U6.1
RESET: C10.1 MCU1.3 R7.2 S1.1 S1.2
RFM95W_CS: MCU1.18 U4.5
RFM95W_INT: MCU1.7 U4.14
RFM95W_RESET: MCU1.12 U4.6
SD_CS: J3.P2 MCU1.34
SD_DETECT: J3.WP MCU1.35 R28.2
SNS_I2C_SCL: MCU1.31 R10.2 U3.2 U10.SCL U11.5
SNS_I2C_SDA: MCU1.23 R21.2 U3.1 U10.SDA U11.6
SNS_SPI_MISO: J3.P7 MCU1.21 R24.2 U4.2
SNS_SPI_MOSI: J3.P3 MCU1.19 R27.2 U4.3
SNS_SPI_SCK: J3.P5 MCU1.20 R25.2 U4.4
USB2_N: MCU1.13 R4.1
USB2_P: MCU1.14 R3.1
VBAT: C1.1 C2.1 P1.1 P1.3 P1.5 Q1.3 Q4.3 R6.2 U1.3 U6.4 U8.4
VBAT_MON: C9.1 MCU1.15 R5.1 R6.1
VBUS: D1.2 J1.A4 J1.A9 J1.B4 J1.B9
VCC_3V3: C7.1 C8.1 C11.1 C12.1 C14.1 C15.1 C16.2 C17.1 C18.1 C19.1 C20.1 C21.1 C22.1 C23.1 C24.1 C25.1 C26.1 D4.A J3.CD J3.P4 LED1.1 LED2.1 LED3.1 MCU1.2 R7.1 R8.1 R9.1 R10.1 R21.1 R23.1 R24.1 R25.1 R26.1 R27.1 R28.1 U2.2 U3.3 U4.13 U5.4 U7.4 U9.3 U9.8 U10.VCC U11.2 U11.3
VCC_5V: C3.1 C4.1 C5.1 C6.1 D1.1 D5.C LS1.1 U1.2 U2.3
WS2812B_DATA: MCU1.6 R29.1
pads on no net: J1. J1.A2 J1.A3 J1.A8 J1.A10 J1.B2 J1.B3 J1.B8 J1.B10 J3. LED3.2 MCU1.8 MCU1.9 MCU1.16 MCU1.24 MCU1.25 MCU1.26 MCU1.29 MCU1.30 MCU1.32 MCU1.33 MCU1.36 MCU1.37 MCU1.41_10 MCU1.41_11 MCU1.41_12 MCU1.41_13 MCU1.41_14 MCU1.41_15 MCU1.41_16 MCU1.41_17 MCU1.41_18 MCU1.41_19 MCU1.41_20 MCU1.41_21 U1.4 U2.4 U4.7 U4.11 U4.12 U4.15 U4.16 U9.1 U9.9 U9.SH1 U9.SH2 U10. U10.XCL U10.XDA U11.1
copper on no net:
  other v2: 137.8,137.8 3602.36,137.8 137.8,1437.01 3602.36,1437.01

## Polygon pours and split planes (outlines as drawn)
VBAT on Bottom Layer "VBAT_L04_P000" (solid, pour order 0): 2230,270 3205,270 3205,45 3195,45 2230,45
GND on GND "GND_L02_P002" (solid, pour order 2): 0,118 0,1456.8 cw(c118,1456.8) 118,1574.8 3622.16,1574.8 cw(c3622.16,1456.8) 3740.16,1456.8 3740.16,118 cw(c3622.16,118) 3622.16,0 118,0 cw(c118,118)
VCC_3V3 on PWR "VCC_3V3_L03_P001" (solid, pour order 1): 0,118 0,1456.8 cw(c118,1456.8) 118,1574.8 3622.16,1574.8 cw(c3622.16,1456.8) 3740.16,1456.8 3740.16,118 cw(c3622.16,118) 3622.16,0 118,0 cw(c118,118)

## Silkscreen, mask and mechanical layers (free items; w line width, h text height)
Top Overlay:
  drawing of 67 lines, arcs and shapes, not listed
  text "IGNIS v2" at 2462.5,560.36 h60
  text "Put that back!" at 412,508 h45 r90
Bottom Overlay:
  drawing of 23 lines, arcs and shapes, not listed
  text "E. Guadarrama      J. A. Prieto" at 1453.75,1376.17 h70.87

## Text inside footprints (layer, text, board x,y; h text height)
MCU1: Top 3D Body "ANTENNA" at 170.98,608.31 h50 r90